# Altium PCB Havashenasi.PcbDoc
Units mm, origin at the board's own origin, x right, y up, seen from the top; angles counter-clockwise.
Board outline 100 x 65 mm, 2 copper layers (Top Layer, Bottom Layer); 76 components, 67 nets, 338 pads, 82 vias.
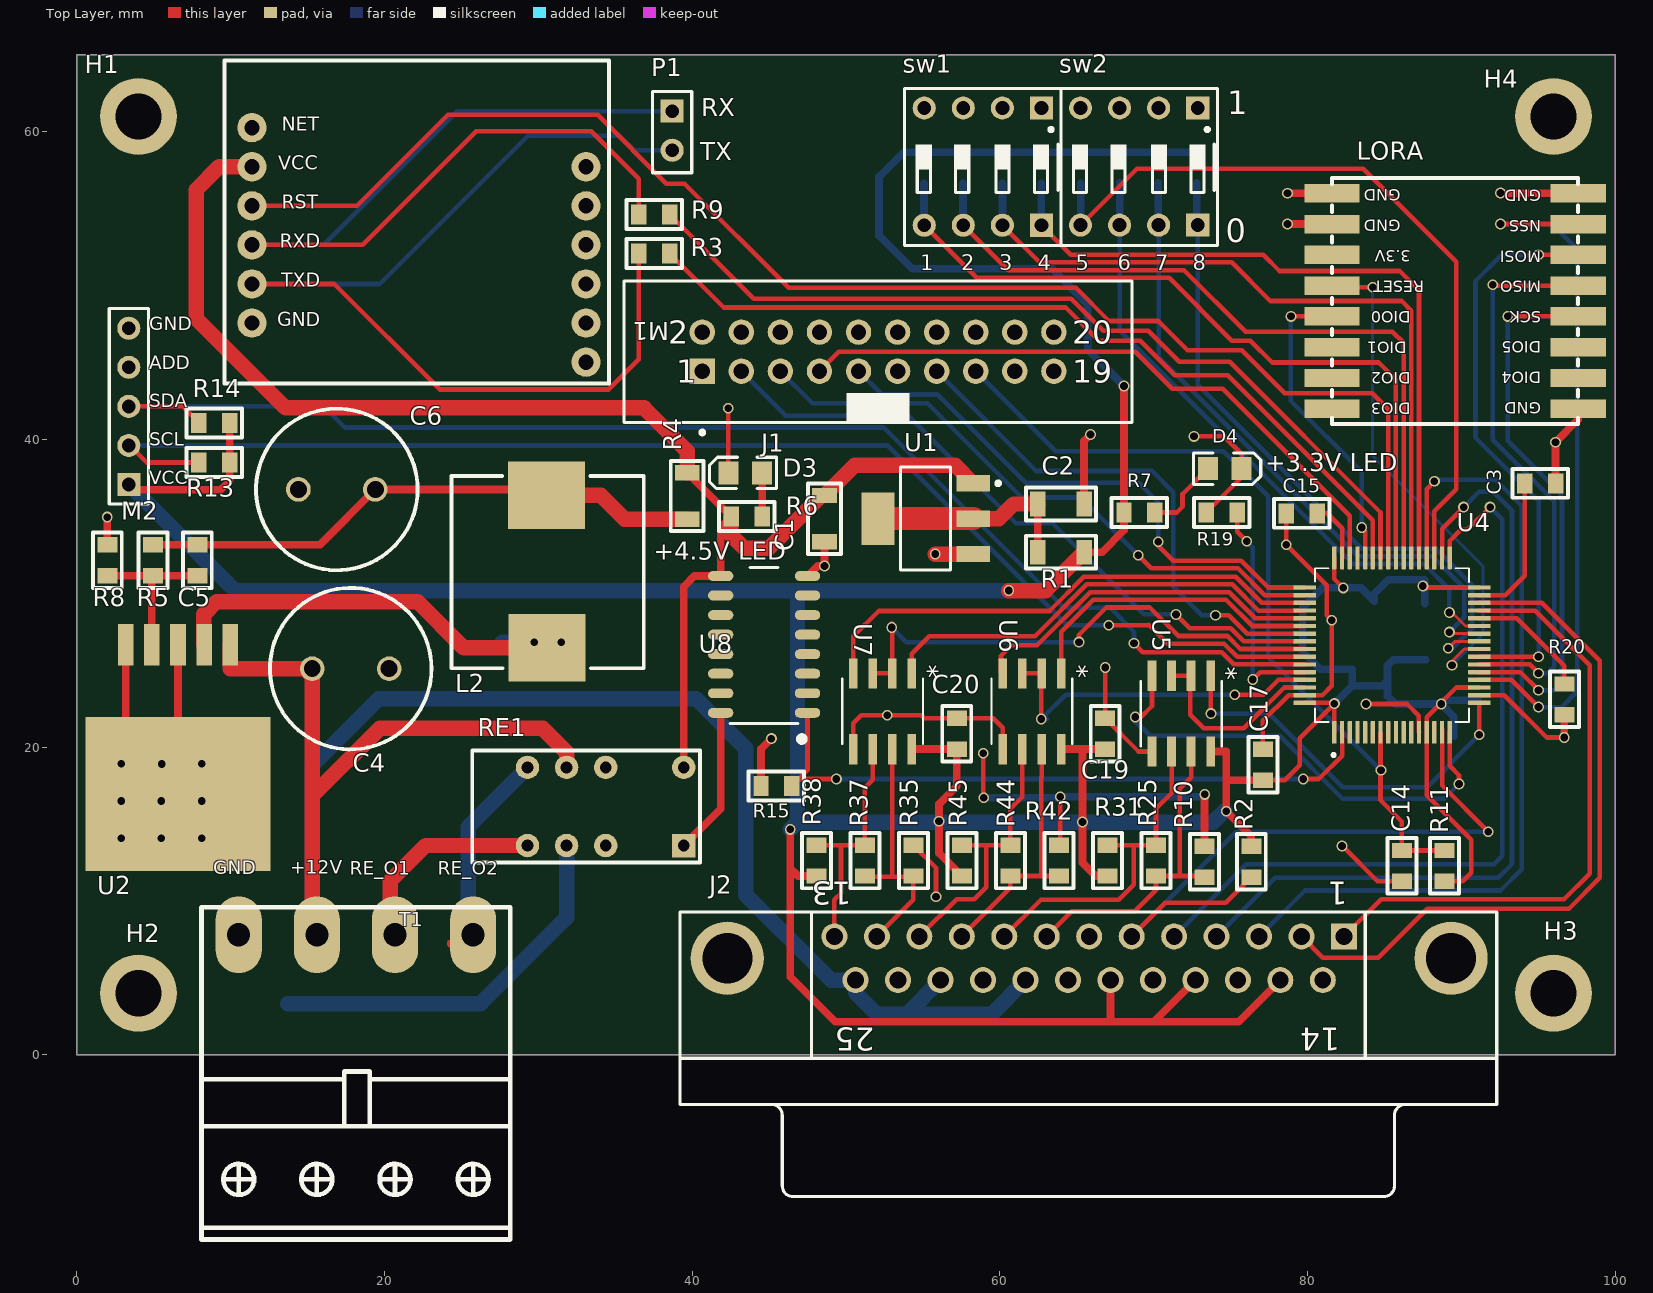
[diagram p0: Top Layer view]
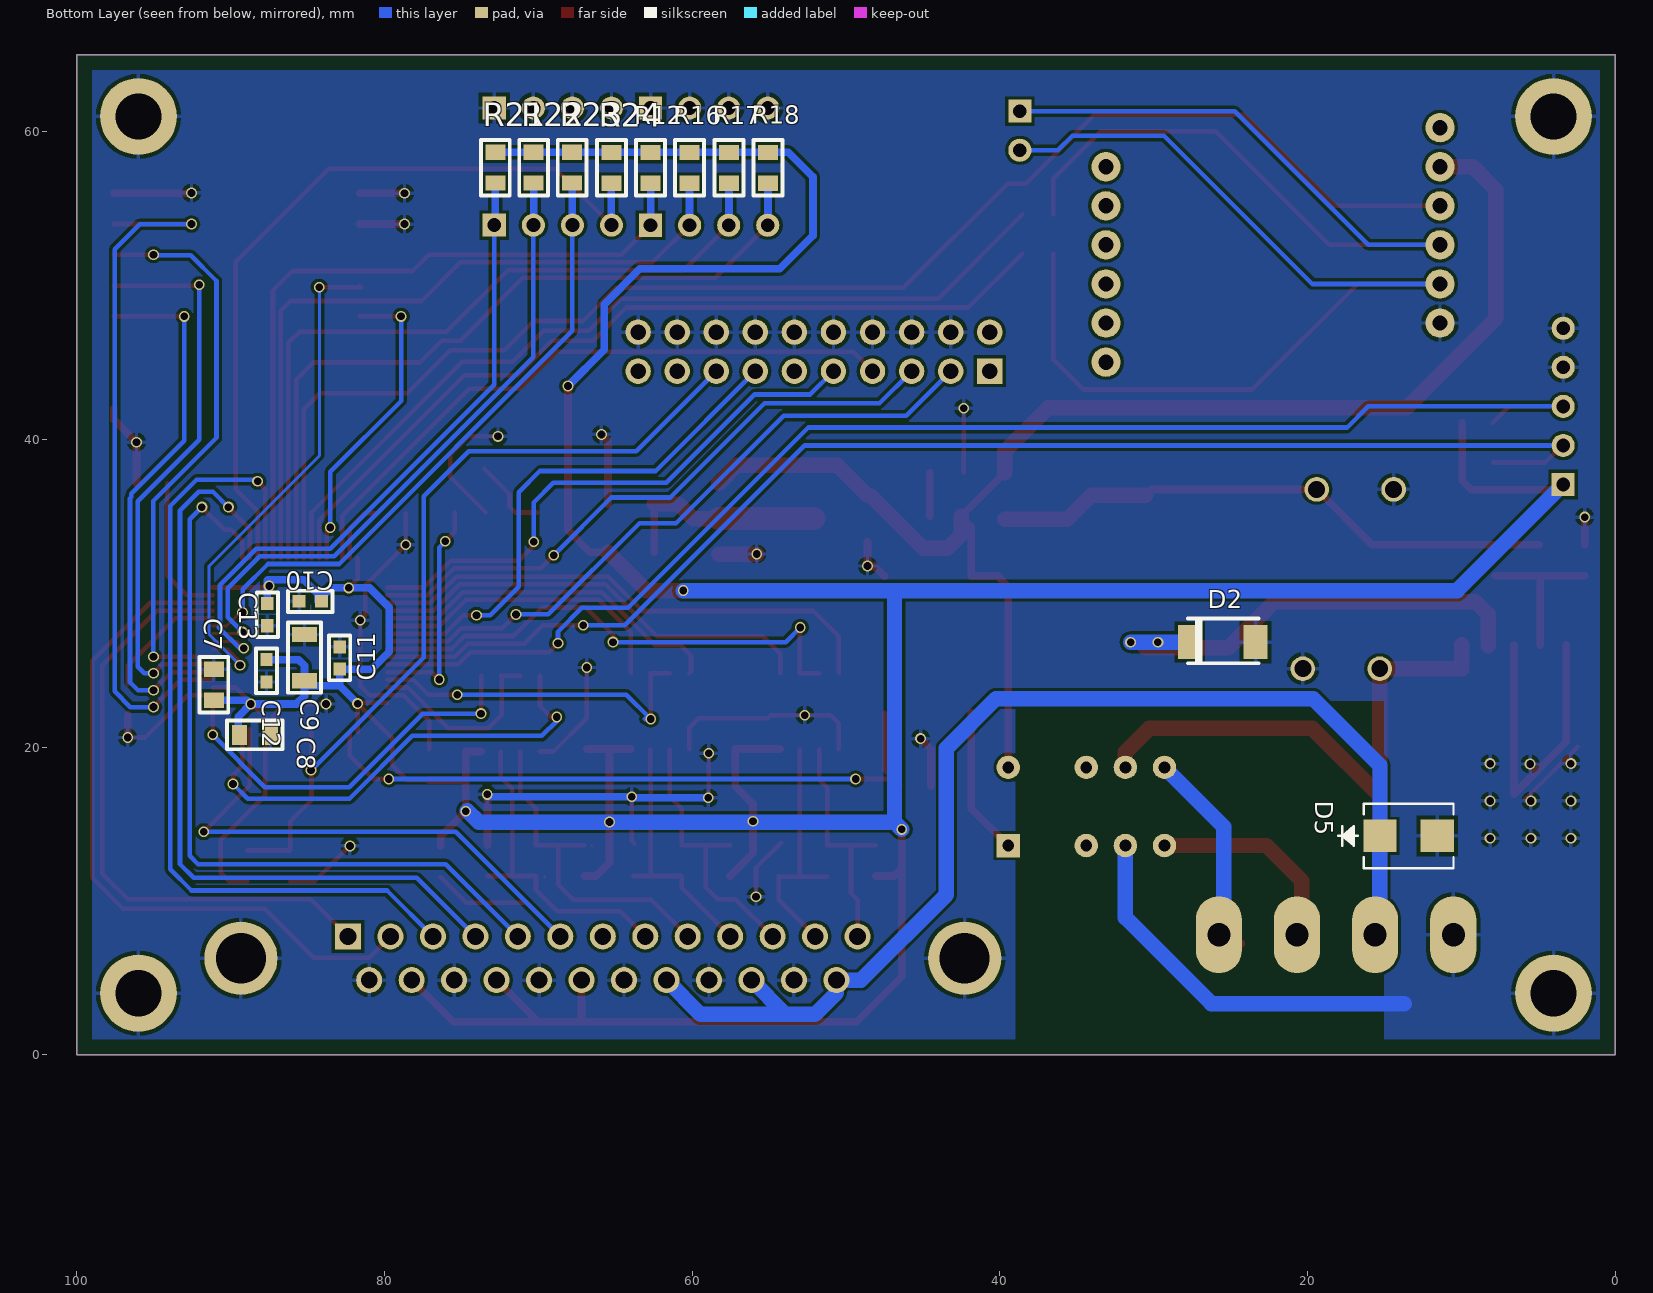
[diagram p1: Bottom Layer view, seen from below]

## Layer stack, top to bottom
Top Solder: solder mask 0.0102, Solder Resist, Dk 3.5
Top Layer: signal copper 0.0356
Dielectric 1: dielectric 0.32, FR-4, Dk 4.8
Bottom Layer: signal copper 0.0356
Bottom Solder: solder mask 0.0102, Solder Resist, Dk 3.5

## Board outline
0,0 0,65 100,65 100,0

## Design rules (kind name [scope] priority, off if disabled: settings)
Clearance [All] p1: gap=0.2 ignorepadtopadclearanceinfootprint=FALSE except(0: Arc-Hole Track-Hole SMDPad-Hole THPad-Hole Via-Hole Fill-Hole Poly-Hole Region-Hole Text-Hole)
Height [All] p1: minheight=0 maxheight=50.4 prefheight=12.7
HoleSize [All] p1: absolutevalues=TRUE maxlimit=4 minlimit=0.025 maxpercent=80.000 minpercent=20.000
MinimumSolderMaskSliver [All] p1: minsoldermaskwidth=0.1
PolygonConnect [All] p1: connectstyle=Relief reliefconductorwidth=0.254 reliefentries=4 polygonreliefangle="90 Angle" airgapwidth=0.254
RoutingVias [All] p1: holewidth=0.7 width=1 viastyle="Through Hole" minholewidth=0.7 minwidth=0.8 maxholewidth=4 maxwidth=6
SolderMaskExpansion [All] p1: expansion=0.102
Width [All] p1: maxlimit=2 minlimit=0.2 preferedwidth=0.3
27 further rules are at their usual default settings.

## Classes and differential pairs
component class Alarm: R15 RE1 U8
component class RS485: C17 C19 C20 R10 R25 R31 R35 R37 R38 R42 R44 R45 U5 U6 U7
component class STM32F405RGT6: C3 C7 C8 C9 C10 C11 C12 C13 C14 C15 J1 R2 R11 R12 R13 R14 R16 R17 R18 R19 R20 R21 R22 R23 R24 sw1 sw2 U4
component class Power: C1 C2 C4 C5 C6 D2 D3 D4 D5 L2 R1 R4 R5 R6 R7 R8 U1 U2
component class SIM800_Module: M1 P1 R3 R9
component class Connector: J2 M2 T1
component class Havashenasi: H1 H2 H3 H4
component class Lora: LORA

## Components (designator, comment, footprint, x,y, rotation, side; value= is the part's Value field where it differs from the comment)
C1 "C-1206" C-1206 48.6,34.825 r90 top value=10uF
C2 "C-1206" C-1206 64,35.8 r180 top value=22uF
C3 "C-805" C-805 95.151,37.15 r180 top value=2.2uF
C4 "Cap Pol1" RB5-10.5 17.8,25.1 r0 top value=220uF
C5 "C-805" C-805 7.825,32.125 r90 top value=2.2nF
C6 "Cap Pol1" RB5-10.5 16.9,36.75 r180 top value=1000uF
C7 "C-805" C-805 91.1,24.025 r90 bottom value=100nF
C8 "C-805" C-805 88.4,20.8 r0 bottom value=1uF
C9 "C-1206" C-1206 85.2,25.845 r270 bottom value=4.7uF
C10 "C-603" C-603 84.823,29.477 r0 bottom value=100nF
C11 "C-603" C-603 82.914,25.794 r90 bottom value=100nF
C12 "C-603" C-603 87.671,24.959 r270 bottom value=100nF
C13 "C-603" C-603 87.621,28.615 r270 bottom value=100nF
C14 "C-805" C-805 86.139,12.301 r270 top value=100nF
C15 "C-805" C-805 79.6,35.2 r0 top value=2.2uF
C17 "C-805" C-805 77.1,18.875 r270 top value=100nF
C19 "C-805" C-805 66.85,20.9 r270 top value=100nF
C20 "C-805" C-805 57.2,20.9 r270 top value=100nF
D2 "1N5822" 1N5822 27.65,26.825 r180 bottom
D3 "LED-805" LED-805 43.45,37.825 r180 top
D4 "LED-805" LED-805 74.625,38.1 r0 top
D5 "SMBJ12A" SMB 13.425,14.225 r180 bottom value=Value
H1 "HOLE_3mm" Hole_3mm#1 -11.2,61.125 r0 top
H2 "HOLE_3mm" Hole_3mm#2 -9.777,4.683 r0 top
H3 "HOLE_3mm" Hole_3mm#3 79.15,3.75 r0 top
H4 "HOLE_3mm" Hole_3mm#4 79.05,61 r0 top
J1 "IDC_2x10" IDC2.54-V20D 52.085,45.705 r0 top
J2 "D Connector 25" DSUB1.385-2H25A 65.812,-3.23 r180 top
L2 "68 uH" Inductor 30.55,26.45 r90 top
LORA "LORA" LORA-RA2-SMD 89.6,49 r180 top
M1 "SIM800_Module_Top" SIM800_Module_Top 22.55,52.625 r0 top
M2 "GY-30_Straight" GY-30_Straight 3.375,37.07 r90 top
P1 "Header 2" HDR1X2 38.7,61.34 r270 top
R1 "R-1206" R-1206 63.95,32.675 r0 top value=0
R2 "R-805" R-805 76.35,12.525 r90 top value=4.7K
R3 "R-805" R-805 37.505,52.083 r0 top value=1k
R4 "R-1206" R-1206 39.675,36.3 r90 top value=0
R5 "R-805" R-805 4.95,32.176 r270 top value=5.1k
R6 "R-805" R-805 43.575,35 r180 top value=1k
R7 "R-805" R-805 69.1,35.25 r180 top value=1k
R8 "R-805" R-805 1.975,32.125 r90 top value=1.96k
R9 "R-805" R-805 37.505,54.623 r0 top value=1k
R10 "R-805" R-805 73.304,12.525 r90 top value=750
R11 "R-805" R-805 88.918,12.3 r270 top value=1k
R12 "R-805" R-805 62.7,57.625 r90 bottom value=10k
R13 "R-805" R-805 8.904,38.5 r0 top value=10k
R14 "R-805" R-805 8.904,41.075 r0 top value=10k
R15 "R-805" R-805 45.45,17.475 r0 top value=10k
R16 "R-805" R-805 60.175,57.625 r90 bottom value=10k
R17 "R-805" R-805 57.6,57.625 r90 bottom value=10k
R18 "R-805" R-805 55.075,57.625 r90 bottom value=10k
R19 "R-805" R-805 74.398,35.25 r0 top value=10k
R20 "R-805" R-805 96.7,23.125 r270 top value=10k
R21 "R-805" R-805 72.8,57.65 r90 bottom value=10k
R22 "R-805" R-805 70.3,57.65 r90 bottom value=10k
R23 "R-805" R-805 67.8,57.65 r90 bottom value=10k
R24 "R-805" R-805 65.251,57.626 r90 bottom value=10k
R25 "R-805" R-805 70.15,12.65 r270 top value=150
R31 "R-805" R-805 66.996,12.599 r90 top value=750
R35 "R-805" R-805 54.382,12.599 r90 top value=750
R37 "R-805" R-805 51.229,12.65 r270 top value=150
R38 "R-805" R-805 48.075,12.599 r90 top value=750
R42 "R-805" R-805 63.843,12.599 r90 top value=750
R44 "R-805" R-805 60.689,12.65 r270 top value=150
R45 "R-805" R-805 57.536,12.599 r90 top value=750
RE1 "EC2-5NU" EC2-5NU 39.455,18.68 r270 top
sw1 "dip_sw4" dipSW_4 62.705,61.545 r180 top
sw2 "dip_sw4" dipSW_4 72.865,61.55 r180 top
T1 "PHONIX4" PHONIX4 25.76,7.8 r180 top
U1 "AMS1117" AMS1117 55.425,34.925 r90 top
U2 "LM2596-ADJ" LM2596SX 6.575,17.6 r180 top
U4 "STM32F405RGT6" stm32f405rgt6 85.5,26.625 r90 top
U5 "ADM3485ARZ" R_8 71.8,22.175 r270 top value=Value
U6 "ADM3485ARZ" R_8 62.087,22.325 r270 top value=Value
U7 "ADM3485ARZ" R_8 52.375,22.325 r270 top value=Value
U8 "ULN2003" ULN20003 44.675,26.675 r180 top value=Value

## Footprints (in the part's own frame and the unit in brackets; to place one, negate y for a bottom-side part, rotate by r counter-clockwise, add the part's x,y. Pads: shape width x height; smd on the part's side, far side on the other; paste and mask are expansions set on the pad)
1N5822 [mm] "Shotky"
  rect 1.56x2.22 smd: 1(0,0) 2(4.275,0)
  silkscreen extent -0.13,-1.38 4.47,1.53
AMS1117 [mm]
  rect 1.05x2.15 smd: 1(2.224,-2.846) 2(-2.376,-2.846) 3(-0.076,-2.846)
  rect 3.4x2.15 smd: 3(-0.076,3.354)
  silkscreen extent -3.43,-4.6 3.27,1.88, body extent -3.4,-3.74 3.3,3.55, height 1.81
C-603 [mm] "Chip Capacitor, Body 1.6x0.8mm, IPC High Density"
  rect 0.85x0.8 smd: 1(-0.725,0) 2(0.725,0)
  silkscreen extent -1.45,-0.69 1.45,0.69
C-805 [mm] "Chip Capacitor, Body 1.6x0.8mm, IPC High Density"
  rect 1x1.3 smd: 1(-0.979,0) 2(1.03,0)
  silkscreen extent -1.78,-0.94 1.83,0.94, body extent -1.05,-0.65 0.95,0.66, height 0.73
C-1206 [mm] "Chip Capacitor, Body 3.2x1.6mm, IPC High Density"
  rect 1x1.6 smd: 1(-1.477,0) 2(1.528,0)
  silkscreen extent -2.26,-1.07 2.31,1.07, body extent -1.5,-0.86 1.7,0.8, height 1.53
dipSW_4 [mm] "Connector; Header; 4 Position"
  rect 1.5x1.5 hole 0.9: 1(0,0) 8(0,7.62)
  round 1.5 hole 0.9: 2(2.54,0) 3(5.08,0) 4(7.62,0) 5(7.62,7.62) 6(5.08,7.62) 7(2.54,7.62)
  silkscreen extent -1.28,-1.27 8.9,8.93
DSUB1.385-2H25A [mm] "Connector; D Subminiature; 25 Position; Right Angle; Pitch 1.385 mm"
  rect 1.69x1.69 hole 1.09: 1(-16.566,-10.92)
  round 1.69 hole 1.09: 2(-13.805,-10.92) 3(-11.044,-10.92) 4(-8.283,-10.92) 5(-5.522,-10.92) 6(-2.761,-10.92) 7(0,-10.92) 8(2.761,-10.92) 9(5.522,-10.92) 10(8.283,-10.92) 11(11.044,-10.92) 12(13.805,-10.92) 13(16.566,-10.92) 14(-15.185,-8.08) 15(-12.424,-8.08) 16(-9.663,-8.08) 17(-6.902,-8.08) 18(-4.141,-8.08) 19(-1.38,-8.08) 20(1.381,-8.08) 21(4.142,-8.08) 22(6.903,-8.08) 23(9.664,-8.08) 24(12.425,-8.08) 25(15.186,-8.08)
  round 4.76 hole 3.26: 26(-23.526,-9.5) 27(23.526,-9.5)
  silkscreen extent -26.5,-12.5 26.6,6, body extent -26.52,-12.64 26.52,6.15, height 12.55
EC2-5NU [mil] "relay"
  round 60 hole 30: 1(0,0) 2(0,-200) 3(0,-300) 4(0,-400) 6(200,-200) 7(200,-300) 8(200,-400)
  rect 60x60 hole 30: 5(200,0)
  silkscreen extent -43,-541 243,41, body extent -47,-545 248,45, height 354
GY-30_Straight [mm]
  rect 1.5x1.5 hole 0.9: 1(0,0)
  round 1.5 hole 0.9: 2(2.54,0) 3(5.08,0) 4(7.62,0) 5(10.16,0)
  silkscreen extent -1.27,-1.27 11.43,1.27, body extent -2.5,-1.3 12.6,4.99, height 33.6
HDR1X2 [mm] "Connector; Header; 3 Position"
  rect 1.5x1.5 hole 0.9: 1(0,0)
  round 1.5 hole 0.9: 2(2.54,0)
  silkscreen extent -1.27,-1.27 4,1.27
Hole_3mm#1 [mm]
  round 5 hole 3: 1(15.2,-0.125)
Hole_3mm#2 [mm]
  round 5 hole 3: 1(13.777,-0.683)
Hole_3mm#3 [mm]
  round 5 hole 3: 1(16.85,0.25)
Hole_3mm#4 [mm]
  round 5 hole 3: 1(16.95,0)
IDC2.54-V20D [mm] "Connector; IDC, Low Profile Male Header, Thru-Hole; 20 Position; Vertical; Pitch 2.54 mm; Body 33.02 x 9.2 x 9.45 mm (LxWxH)"
  rect 1.65x1.65 hole 1: 1(-11.43,-1.27)
  round 1.65 hole 1: 2(-11.43,1.27) 3(-8.89,-1.27) 4(-8.89,1.27) 5(-6.35,-1.27) 6(-6.35,1.27) 7(-3.81,-1.27) 8(-3.81,1.27) 9(-1.27,-1.27) 10(-1.27,1.27) 11(1.27,-1.27) 12(1.27,1.27) 13(3.81,-1.27) 14(3.81,1.27) 15(6.35,-1.27) 16(6.35,1.27) 17(8.89,-1.27) 18(8.89,1.27) 19(11.43,-1.27) 20(11.43,1.27)
  silkscreen extent -16.51,-5.37 16.51,4.6, body extent -16.51,-4.32 16.51,4.48, height 9.1
Inductor [mm]
  rect 4.4x5 smd: 1(0,0) 2(9.925,0.025)
  silkscreen extent -1.32,-6.3 11.18,6.2
LED-805 [mm] "Chip Resistor; Body 2.0 x 1.3 mm (LxW typ)"
  rect 1.3x1.5 smd: 1(-1.1,0) 2(1.1,0)
  silkscreen extent -2.03,-1.02 2.34,1.02, body extent -1.2,-0.67 0.9,0.68, height 1.1
LM2596SX [mil]
  rect 40x106 smd: 1(-134,-356) 2(-67,-356) 3(0,-356) 4(67,-356) 5(134,-356)
  rect 472.44x393.7 smd: 6(0,25.68)
  body extent -207,-346 203,131, height 189
LORA-RA2-SMD [mil]
  rect 141.7x47.2 smd: 1(-315,276) 2(-315,197) 3(-315,118) 4(-315,39) 5(-315,-39) 6(-315,-118) 7(-315,-197) 8(-315,-276) 9(315,-276) 10(315,-197) 11(315,-118) 12(315,-39) 13(315,39) 14(315,118) 15(315,197) 16(315,276)
  silkscreen extent -315,-315 315,315
PHONIX4 [mm]
  oval 3x5 hole 1.5: 1(0,0) 2(5.08,0) 3(10.16,0) 4(15.24,0)
  silkscreen extent -2.41,-1.78 17.65,19.81
R-805 [mm] "Chip Capacitor, Body 1.6x0.8mm, IPC High Density"
  rect 1x1.3 smd: 1(-0.979,0) 2(1.03,0)
  silkscreen extent -1.78,-0.94 1.83,0.94, body extent -1.05,-0.63 0.95,0.63, height 0.5
R-1206 [mm] "Chip Capacitor, Body 3.2x1.6mm, IPC High Density"
  rect 1x1.6 smd: 1(-1.477,0) 2(1.528,0)
  silkscreen extent -2.26,-1.07 2.31,1.07, body extent -1.87,-0.8 1.87,0.8, height 0.7
R_8 [mm]
  rect 1.97x0.568 smd paste+0 mask+0: 1(-2.464,1.905) 2(-2.464,0.635) 3(-2.464,-0.635) 4(-2.464,-1.905) 5(2.464,-1.905) 6(2.464,-0.635) 7(2.464,0.635) 8(2.464,1.905)
  silkscreen extent -2.12,-2.63 2.12,2.63, body extent -3.1,-2.5 3.1,2.5, height 1.76
RB5-10.5 [mm] "Capacitor (Radial); 2 Leads"
  round 1.6 hole 1.1: 1(-2.5,0) 2(2.5,0)
  silkscreen extent -5.25,-5.25 5.25,5.25, body extent -4.9,-4.85 5.11,5.15, height 16.01
SIM800_Module_Top [mm]
  round 1.905 hole 1: 1(-11.168,-5.057) 2(-11.168,-2.517) 3(-11.168,0.023) 4(-11.168,2.563) 5(-11.168,5.103) 6(-11.168,7.643) 7(10.549,5.103) 8(10.549,2.563) 9(10.549,0.023) 10(10.549,-2.517) 11(10.549,-5.057) 12(10.549,-7.597)
  silkscreen extent -12.95,-9 12.05,12, body extent -12.91,-10.6 11.91,12.7, height 5.33
SMB [mm]
  rect 2.17x2.11 smd paste+0 mask+0: 1(-1.86,0) 2(1.86,0)
  silkscreen extent -4.57,-2.1 2.92,2.1, body extent -2.79,-1.97 2.8,1.97, height 2.45
stm32f405rgt6 [mm]
  rrect25% 1.47x0.28 smd: 1(-5.67,3.75) 2(-5.67,3.25) 3(-5.67,2.75) 4(-5.67,2.25) 5(-5.67,1.75) 6(-5.67,1.25) 7(-5.67,0.75) 8(-5.67,0.25) 9(-5.67,-0.25) 10(-5.67,-0.75) 11(-5.67,-1.25) 12(-5.67,-1.75) 13(-5.67,-2.25) 14(-5.67,-2.75) 15(-5.67,-3.25) 16(-5.67,-3.75) 33(5.67,-3.75) 34(5.67,-3.25) 35(5.67,-2.75) 36(5.67,-2.25) 37(5.67,-1.75) 38(5.67,-1.25) 39(5.67,-0.75) 40(5.67,-0.25) 41(5.67,0.25) 42(5.67,0.75) 43(5.67,1.25) 44(5.67,1.75) 45(5.67,2.25) 46(5.67,2.75) 47(5.67,3.25) 48(5.67,3.75)
  rrect25% 0.28x1.47 smd: 17(-3.75,-5.67) 18(-3.25,-5.67) 19(-2.75,-5.67) 20(-2.25,-5.67) 21(-1.75,-5.67) 22(-1.25,-5.67) 23(-0.75,-5.67) 24(-0.25,-5.67) 25(0.25,-5.67) 26(0.75,-5.67) 27(1.25,-5.67) 28(1.75,-5.67) 29(2.25,-5.67) 30(2.75,-5.67) 31(3.25,-5.67) 32(3.75,-5.67) 49(3.75,5.67) 50(3.25,5.67) 51(2.75,5.67) 52(2.25,5.67) 53(1.75,5.67) 54(1.25,5.67) 55(0.75,5.67) 56(0.25,5.67) 57(-0.25,5.67) 58(-0.75,5.67) 59(-1.25,5.67) 60(-1.75,5.67) 61(-2.25,5.67) 62(-2.75,5.67) 63(-3.25,5.67) 64(-3.75,5.67)
  silkscreen extent -7.24,-5 5,5, body extent -5.96,-6.01 6.06,6.01, height 1.6
ULN20003 [mm]
  oval 1.65x0.65 smd paste+0 mask+0.051: 1(-2.825,4.445) 2(-2.825,3.175) 3(-2.825,1.905) 4(-2.825,0.635) 5(-2.825,-0.635) 6(-2.825,-1.905) 7(-2.825,-3.175) 8(-2.825,-4.445) 9(2.825,-4.445) 10(2.825,-3.175) 11(2.825,-1.905) 12(2.825,-0.635) 13(2.825,0.635) 14(2.825,1.905) 15(2.825,3.175) 16(2.825,4.445)
  silkscreen extent -2.58,-5 2.2,6.27

## Part data
C1 C2 C3 C5 C7 C8 C9 C10 C11 C12 C13 C14 C15 C17 C19 C20: "Capacitor", LatestRevisionDate=29-May-2009, LatestRevisionNote="IPC-7351 Footprint Added.", PackageDescription="Chip Capacitor", PackageReference=C1206, Published=8-Jun-2000, Publisher="Altium Limited"
C4 C6: "Polarized Capacitor (Radial)", LatestRevisionDate=17-Jul-2002, LatestRevisionNote="Re-released for DXP Platform.", PackageDescription="Polarized Capacitor (Radial); 2 Leads", PackageReference=RB7.6-15, Published=8-Jun-2000, Publisher="Altium Limited"
D3 D4: "LED Size 805", LatestRevisionDate=17-Jul-2002, LatestRevisionNote="Re-released for DXP Platform.", PackageDescription="SM LED; 2 Flat Leads", PackageReference=3.2X1.6X1.1, PackageVersion=Feb-2002, Published=8-Jun-2000, Publisher="Altium Limited"
D5: "No Description Available", Manufacturer_Part_Number=SMBJ12A-13-F, Built_By=EMA_UL_Team, Copyright="Copyright (C) 2018 Accelerated Designs. All rights reserved", RefDes=RefDes, Type=DEV, Vendor="Diodes Inc"
J1: library part JTAG_JLINK, "20 Pin Standard JTAG Header For ARM JLINK", Max Current=mA, Category=Headers, Company="SJ Libraries", ComponentLink1Description=Datasheet, ComponentLink2Description=Reference, Connector type=IDC2.54-20, designer="Eng. Saeid Jorablo", HelpURL=http://s3.picofile.com/file/7443264187/Coming_Soon_logo.gif, Mounting Technology=Through-Hole, Orientation=Vertical, Pin Count=20, Positions=20, Publisher="SJ UnLimited", Revision 1="7/8/2012: Create Model", Status=Unreleased, Update=7/8/2012
J2: "Receptacle Assembly, 25 Position, Right Angle", PackageDocument=U, DatasheetDocument=19-Mar-1999, Gender=Receptacle, LatestRevisionDate=17-Jul-2002, LatestRevisionNote="Re-released for DXP Platform.", Orientation="Right Angle", PackageReference=787202, Positions=25, Published=15-Jun-2001, Publisher="Altium Limited"
L2: library part Inductor, "Power inductor"
P1: "Header, 3-Pin", LatestRevisionDate=17-Jul-2002, LatestRevisionNote="Re-released for DXP Platform.", Publisher="Altium Limited"
R1 R2 R3 R4 R5 R6 R7 R8 R9 R10 R11 R12 R13 R14 R15 R16 R17 R18 R19 R20 R21 R22 R23 R24 R25 R31 R35 R37 R38 R42 R44 R45: "Resistor"
RE1: library part EC2_5NU
sw1 sw2: "dip switch, 4-Pin", LatestRevisionDate=17-Jul-2002, LatestRevisionNote="Re-released for DXP Platform.", Publisher="Altium Limited"
U1: "3.3v regulator"
U2: "SIMPLE SWITCHER Power Converter 150 KHz 3A Step-Down Voltage Regulator 5-DDPAK/TO-263", Package="TO-263-6 Texas Instruments", Availability=Unavailable, MF="Texas Instruments", MP=LM2596-ADJ, Price="1.83 USD", SnapEDA_Link=https://www.snapeda.com/parts/LM2596SX-12/Texas%20Instruments/view-part/?ref=snap
U4: "ARMÂ® CortexÂ®-M4 STM32F4 Microcontroller IC 32-Bit 168MHz 1MB _1M x 8_ FLASH 64-LQFP _10x10_", Package="LQFP-64 STMicroelectronics", Digi-Key_Part_Number=497-11767-ND, Digi-Key_Purchase_URL=https://www.digikey.com/product-detail/en/stmicroelectronics/STM32F405RGT6/497-11767-ND/2754208?utm_source=snapeda&utm_medium=aggregator&utm_campaign=symbol, MF=STMicroelectronics, MP=STM32F405RGT6, SnapEDA_Link=https://www.snapeda.com/parts/STM32F405RGT6/STMicroelectronics/view-part/105502/?ref=snap
U5 U6 U7: "No Description Available", Built_By=EMA_UL_Team, Copyright="Copyright (C) 2018 Accelerated Designs. All rights reserved", Manufacturer_Part_Number=ADM3485ARZ, RefDes=RefDes, Type=DEV, Vendor="Analog Devices Inc"
U8: "No Description Available", Manufacturer="Texas Instruments", PartNumber=ULN2003ADR, Copyright="Copyright (C) 2018 Accelerated Designs. All rights reserved", RefDes=RefDes, Type=DEV
M2: LatestRevisionDate=17-Jul-2002, LatestRevisionNote="Re-released for DXP Platform.", Publisher="Altium Limited"

## Via types
v1: diameter 0.7, hole 0.5, Top Layer to Bottom Layer, 82 vias

## Nets (pads, with @x,y where several pads share a name; then routed paths per layer and width w, separated by ;. In a path a pad name is that pad's centre, name@x,y a point inside that pad or via, vN(x,y) a via of type N, cw(c..) or ccw(c..) an arc to the next point about the centre after c; other vN are vias at no path point)
+3.3V: C7.1 C8.2 C9.2 C10.1 C11.1 C12.1 C13.1 C17.2 C19.2 C20.2 J2.15 J2.17 J2.19 M2.1 R1.2 R2.2 R7.2 R11.2 R12.2 R13.2 R14.2 R16.2 R17.2 R18.2 R21.2 R22.2 R23.2 R24.2 R31.1 R38.1 R45.1 U4.1 U4.13 U4.19 U4.32 U4.48 U4.64 U5.8 U6.8 U7.8 | length 338.1
  Top Layer w0.3: 74.725,19.705 74.75,19.73 ; C17.2 78.52,17.845 79.5,18.825 79.5,20.575 v1(81.75,22.825) ; U4.64 81.7,22.875 v1(81.75,22.825) ; U4.1 v1(81.75,22.825) ; U4.48 81.75,30.925 v1(82.325,30.35) ; v1(87.504,30.476) 87.606,30.375 U4.32 ; R11.2 90.095,11.27 90.65,11.825 90.65,13.975 87.75,16.875 U4.13 87.75,21.95 89.675,23.875 U4.19
  Top Layer w0.5: M2.1@3.125,37.07 M2.1 3.72,36.725 9.35,36.725 9.934,37.309 R13.2 R14.2 ; v1(46.375,14.65) 46.375,12.125 ; R38.1 46.88,11.62 46.375,12.125 ; U7.8 54.289,19.87 C20.2 57.2,17.45 56.05,16.3 v1(56.05,15.175) 56.05,13.106 R45.1 ; U6.8 64.001,19.87 65.3,19.87 ; R1.2 66.65,32.675 68.07,34.095 R7.2 v1@68.07,43.48 ; C19.2 65.3,19.87 ; R31.1 66.23,11.62 65.375,12.475 v1(65.375,15.125) 65.375,19.795 65.3,19.87 ; J2.19 67.192,2.158 67.2,2.15 ; J2.17 70.014,2.15 ; U5.8@73.711,19.705 U5.8 74.719,19.711 74.725,19.705 74.725,17.875 ; R2.2 76.35,14.2 v1(74.725,15.825) 74.725,17.875 ; C17.2 74.755,17.845 74.725,17.875 ; J2.15 75.536,2.15 70.014,2.15 ; 46.375,12.125 46.375,5.075 49.3,2.15 67.2,2.15 ; 67.2,2.15 70.014,2.15
  Top Layer w1: v1(60.575,30.175) 60.578,30.172 62.975,30.172 R1.2
  Bottom Layer w0.5: v1(68.075,43.475) 65.725,45.825 65.725,48.775 63.4,51.1 54.3,51.1 52.15,53.25 52.15,57.075 53.755,58.68 60.175,58.68 R21.2 ; v1(81.75,22.825) 82.914,23.989 ; C10.1@84.348,29.477 C10.1@84.348,29.481 ; C13.1 87.621,30.854 87.6,30.875 85.25,30.875 84.348,29.973 C10.1@84.348,29.481 ; C12.1 85.591,25.684 85.2,25.294 C9.2 ; C8.2@89.52,20.725 89.52,21.98 v1(88.7,22.8) ; C7.1 88.946,23.046 v1(88.7,22.8) ; 82.914,23.989 C11.1 80.831,25.069 79.7,26.2 79.7,29.075 80.975,30.35 v1(82.325,30.35) 83.479,30.35 C10.1@84.348,29.481 ; 82.914,23.989 84.872,23.989 C9.2 ; C9.2 85.2,23.325 85.725,22.8 v1(88.7,22.8)
  Bottom Layer w1: M2.1 10.27,30.175 46.85,30.175 ; v1(46.375,14.65) 46.85,15.125 v1(65.375,15.125) 73.875,15.125 v1@74.625,15.875 ; 46.85,15.325 46.85,30.175 ; v1(60.575,30.175) 46.85,30.175
+3.3V_LORA: LORA.11
+4.5V: C1.2 M1.5 R4.2 R6.2 RE1.1 U1.1 U8.9 | length 92.1
  Top Layer w0.5: RE1.1 39.455,30.43 40.145,31.12 U8.9 41.85,34.305 R6.2@42.503,34.958 ; R4.2 R6.2@42.503,35
  Top Layer w1: M1.5 9.253,57.728 7.75,56.225 7.75,47.875 13.575,42.05 36.875,42.05 39.675,39.25 R4.2 ; R6.2@42.503,35 42.503,34.958 42.503,33.822 43.4,32.925 44.975,32.925 48.403,36.353 C1.2 50.572,38.325 57.095,38.325 U1.1
+12V: C4.1 D5.1 J2.21 J2.23 J2.25 RE1.3 T1.3 U2.1 | length 120.8
  Top Layer w1: U2.1 9.979,25.1 14.8,25.1 15.29,24.61 15.29,16.825 ; T1.3@15.29,8.25 15.29,16.825 ; RE1.3 31.835,19.665 30.275,21.225 19.69,21.225 15.29,16.825
  Bottom Layer w1: T1.3@15.29,8.25 15.29,14.22 D5.1 15.285,18.81 19.625,23.15 40.25,23.15 43.475,19.925 43.475,10.4 49.025,4.85 J2.25 50.626,4.024 52.025,2.625 53.923,2.625 ; J2.23 53.923,2.625 ; J2.21 59.445,2.625 53.923,2.625
addr0: R18.1 sw1.5 U4.40 | length 49.1
  Top Layer w0.3: sw1.5 58.51,50.5 71.01,50.5 75.085,46.425 76.275,46.425 77.7,45 84.625,45 85.75,43.875 U4.40
  Bottom Layer w0.5: R18.1 55.075,53.935 sw1.5
addr1: R17.1 sw1.6 U4.39 | length 48.5
  Top Layer w0.3: sw1.6 60.55,51 71.975,51 75.975,47 85.525,47 86.25,46.275 U4.39
  Bottom Layer w0.5: R17.1 57.6,53.95 sw1.6
addr2: R16.1 sw1.7 U4.38 | length 47.7
  Top Layer w0.3: sw1.7 62.582,51.508 75.082,51.508 77.59,49 86.125,49 86.75,48.375 U4.38
  Bottom Layer w0.5: sw1.7 60.175,53.935 R16.1
addr3: R12.1 sw1.8 U4.37 | length 46.4
  Top Layer w0.3: sw1.8 64.622,52.008 77.122,52.008 78.18,50.95 86,50.95 87.25,49.7 U4.37
  Bottom Layer w0.5: R12.1 62.7,53.93 sw1.8
addr4: R24.1 sw2.5 U4.35 | length 51
  Top Layer w0.3: sw2.5 68.915,57.6 83.625,57.6 89.675,51.55 89.675,36.75 88.25,35.325 U4.35
  Bottom Layer w0.5: sw2.5 65.251,53.936 R24.1
addr5: R23.1 sw2.6 U4.27 | length 41.8
  Top Layer w0.2: v1(89.225,28.75) 89.4,28.75 90.275,27.875 U4.27
  Bottom Layer w0.3: sw2.6 67.785,47.065 82.95,31.9 87.575,31.9 89.225,30.25 v1(89.225,28.75)
  Bottom Layer w0.5: sw2.6 67.8,53.945 R23.1
addr6: R22.1 sw2.7 U4.26 | length 42.7
  Top Layer w0.2: v1(89.225,27.475) 89.325,27.375 U4.26
  Bottom Layer w0.3: sw2.7 70.325,45.35 83.275,32.4 88.125,32.4 90.2,30.325 90.2,28.45 v1(89.225,27.475)
  Bottom Layer w0.5: R22.1 70.3,53.955 sw2.7
addr7: R21.1 sw2.8 U4.25 | length 43.5
  Top Layer w0.2: v1(89.15,26.425) 89.6,26.875 U4.25
  Bottom Layer w0.3: sw2.8 72.865,43.56 83.525,32.9 88.332,32.9 90.7,30.532 90.7,27.85 90.775,27.775 89.425,26.425 v1(89.15,26.425)
  Bottom Layer w0.5: R21.1 72.8,53.995 sw2.8
Alarm_out_1: RE1.8 T1.2 | length 12.9
  Top Layer w1: T1.2@20.37,8.25 20.37,11.295 22.675,13.6 RE1.8
Alarm_out_2: RE1.4 T1.1 | length 13.6
  Top Layer w0.3: 24.203,7.312 T1.1@24.315,7.2
  Top Layer w0.5: T1.1@24.315,7.2 T1.1@25.745,7.2
  Bottom Layer w1: T1.1@25.45,8.25 25.45,14.835 RE1.4
BOOT0: R19.2 U4.60 | length 14.9
  Top Layer w0.3: R19.2 75.428,33.997 v1(76.05,33.375) ; v1(76.45,24.4) 76.925,24.875 U4.60
  Bottom Layer w0.3: v1(76.05,33.375) 76.45,32.975 v1(76.45,24.4)
BOOT1: R20.1 U4.28 | length 8
  Top Layer w0.3: U4.28 93.6,28.375 96.7,25.275 R20.1
GND: C1.1 C2.1 C3.1 C4.2 C6.2 C7.2 C8.1 C9.1 C10.2 C11.2 C12.2 C13.2 C14.2 C15.1 C17.1 C19.1 C20.1 D2.2 D3.2 D4.2 D5.2 H1.1 H2.1 H3.1 H4.1 J1.4 J1.6 J1.8 J1.10 J1.12 J1.14 J1.16 J1.18 J1.20 J2.14 J2.16 J2.18 J2.20 J2.22 J2.24 J2.26 J2.27 LORA.1 LORA.8 LORA.9 LORA.10 M1.1 M2.4 M2.5 R8.2 R10.2 R15.1 R19.1 R20.2 R35.2 R42.2 RE1.7 sw1.1 sw1.2 sw1.3 sw1.4 sw2.1 sw2.2 sw2.3 sw2.4 T1.4 U1.2 U2.3 U2.5 U2.6 U4.12 U4.18 U4.63 U5.5 U6.5 U7.5 U8.8 | length 181
  Top Layer w0.3: U2.6@2.421,20.026 U2.6@5.825,16.623 ; D3.2 v1(42.35,42.025) ; U7.5 50.47,21.545 51,22.075 v1(52.675,22.075) 54.9,22.075 55.096,21.879 C20.1 59.571,21.879 60.182,21.268 U6.5 ; R35.2@54.221,13.79 R35.2 55.85,12.162 v1(55.85,10.275) ; v1(58.925,19.6) 58.925,16.725 v1(58.95,16.7) ; R42.2@63.75,13.722 63.925,13.897 v1(63.925,16.775) ; v1(66.85,25.175) C19.1 69.018,19.711 U5.5 ; v1(72.625,40.2) 74.55,40.2 75.725,39.025 D4.2 75.725,37.556 R19.1 ; C17.1 77.1,21.7 78.775,23.375 U4.63 80.975,23.375 81.575,23.975 v1(81.575,28.25) 81.25,28.575 81.25,30.525 v1(78.625,33.15) 78.621,33.154 C15.1 ; v1(82.25,13.575) 84.554,11.271 C14.2 ; v1(83.8,22.8) 86.472,22.8 87.24,22.032 87.24,20.965 U4.12 ; J2.26@87.838,6.162 J2.26@87.838,6.27 ; U4.18 92.8,23.375 95.55,20.625 v1(96.7,20.625)
  Top Layer w0.5: R8.2 v1(1.975,34.95) ; U2.5 3.171,20.351 U2.6 U2.3 ; R15.1 44.471,19.871 v1(45.15,20.55) ; U8.8 48.155,31.775 v1(48.6,31.775) C1.1 ; C2.1 65.477,39.902 v1(65.9,40.325) ; v1@73.3,16.8 73.3,13.633 R10.2@73.304,13.629 ; v1(78.7,54) 81.595,54 LORA.10 ; v1(78.7,56) 78.71,56.01 LORA.9 ; v1(92.55,56.025) 92.565,56.01 LORA.8 ; C3.1 96.125,37.155 v1(96.125,39.825) 97.601,41.301 LORA.1 ; v1(96.7,20.625) R20.2
  Top Layer w1: v1(55.8,32.55) v1(55.8,32.55) U1.2
  Bottom Layer w0.5: v1(58.95,16.7) 63.85,16.7 v1(63.925,16.775) 73.175,16.775 v1(73.325,16.925)
  Bottom Layer w1: 13.7,3.325 26.25,3.325 31.835,8.91 RE1.7
  other v1: 2.875,14.075 5.475,14.075 8.125,14.075 2.875,16.5 5.475,16.5 8.125,16.5 5.525,18.9 2.875,18.925 8.125,18.925
JTCK: J1.9 U4.49 | length 36.5
  Top Layer w0.3: v1(70.3,33.35) 70.3,33.1 71.275,32.125 75.689,32.125 77.439,30.375 U4.49
  Bottom Layer w0.3: J1.9 52.325,42.925 55.925,42.925 61.675,37.175 69.025,37.175 70.3,35.9 v1(70.3,33.35)
JTDI: J1.5 U4.50 | length 40.1
  Top Layer w0.3: v1(69,32.475) 69.85,31.625 75.482,31.625 77.232,29.875 U4.50
  Bottom Layer w0.3: J1.5 47.82,42.35 55.3,42.35 61.425,36.225 65.25,36.225 v1(69,32.475)
JTDO: J1.13 U4.55 | length 34.6
  Top Layer w0.3: v1(74.025,28.575) 74.875,28.575 76.075,27.375 U4.55
  Bottom Layer w0.3: J1.13 62.38,37.95 69.9,37.95 71.275,36.575 71.275,30.425 73.125,28.575 v1(74.025,28.575)
JTMS: J1.7 U4.46 | length 42.2
  Top Layer w0.3: J1.7 49.54,45.7 68.8,45.7 71.2,43.3 74.5,43.3 82.75,35.05 U4.46
JTRST: J1.3 U4.56 | length 43.9
  Top Layer w0.3: v1(71.45,28.625) 72.35,27.725 75,27.725 75.85,26.875 U4.56
  Bottom Layer w0.3: J1.3 46.08,41.55 54.05,41.55 61.05,34.55 63.425,34.55 69.35,28.625 v1(71.45,28.625)
LORA_DIO0: LORA.13 U4.44 | length 20.4
  Top Layer w0.3: v1(78.925,48) 78.934,48.009 LORA.13 ; v1(83.525,34.275) 83.75,34.05 U4.44
  Bottom Layer w0.3: v1(78.925,48) 78.925,42.5 83.525,37.9 v1(83.525,34.275)
LORA_RST: LORA.12 U4.24 | length 33.5
  Top Layer w0.2: v1(89.4,25.325) 89.4,25.575 90.2,26.375 U4.24
  Top Layer w0.3: LORA.12 81.508,49.9 v1(84.25,49.9)
  Bottom Layer w0.2: v1@84.225,49.775 84.225,38.95 91.4,31.775 91.4,27.325 v1(89.4,25.325)
LORA_SPI_MISO: LORA.5 U4.22 | length 37.3
  Top Layer w0.3: U4.22 94.45,25.375 v1(95.025,24.8) ; v1@92.05,50 97.592,50 LORA.5
  Bottom Layer w0.3: v1@92.05,50 92.05,39.975 96.05,35.975 96.05,25.225 95.625,24.8 v1(95.025,24.8)
  other v1: 92.05,50.05
LORA_SPI_MOSI: LORA.6 U4.23 | length 37.3
  Top Layer w0.3: U4.23 v1(95.025,25.875) ; v1(95.025,52) 95.028,51.997 LORA.6
  Bottom Layer w0.3: v1(95.025,25.875) 95.025,36 90.925,40.1 90.925,50.3 92.6,51.975 v1@95.025,51.975
LORA_SPI_NSS: LORA.7 U4.20 | length 47
  Top Layer w0.3: U4.20 93.25,24.375 v1(95.025,22.6) ; v1(92.55,54) 92.554,54.004 LORA.7
  Bottom Layer w0.3: v1(92.55,54) 95.925,54 97.55,52.375 97.55,23.625 96.525,22.6 v1(95.025,22.6)
LORA_SPI_SCK: LORA.4 U4.21 | length 35.9
  Top Layer w0.3: U4.21 93.85,24.875 v1(95.025,23.7) ; v1(93.025,48) 93.034,48.009 LORA.4
  Bottom Layer w0.3: v1(93.025,48) 93.025,39.925 96.475,36.475 96.475,36.257 96.55,36.182 96.55,24.225 96.025,23.7 v1(95.025,23.7)
MC_Alarm_out: R15.2 U4.2 U8.1 | length 42.6
  Top Layer w0.3: R15.2 R15.2@46.93,17.925 ; U8.1 47.5,18.495 R15.2@46.93,17.925 ; v1(49.375,17.925) R15.2@46.93,17.925 ; v1(79.725,17.925) 80.725,17.925 82.25,19.45 U4.2
  Bottom Layer w0.3: v1(49.375,17.925) v1(79.725,17.925)
MC_DQ_DS18B20: J2.6 R2.1 U4.15 | length 43.3
  Top Layer w0.3: J2.6 70.757,9.875 74.679,9.875 R2.1 ; U4.15@88.75,21.152 U4.15 88.75,17.5 v1(91.75,14.5)
  Bottom Layer w0.3: J2.6 75.383,14.5 v1(91.75,14.5)
MC_I2C1_SCL: M2.2 R13.1 U4.58 | length 87.7
  Top Layer w0.3: M2.2@3.125,39.61 M2.2 3.44,39.61 4.55,38.5 R13.1 ; v1(67.075,27.925) 69.657,27.925 69.691,27.959 70.925,26.725 74.575,26.725 75.425,25.875 U4.58
  Bottom Layer w0.3: M2.2@3.125,39.61 M2.2 52.69,39.61 64.375,27.925 v1(67.075,27.925)
MC_I2C1_SDA: M2.3 R14.1 U4.59 | length 89.4
  Top Layer w0.3: M2.3@3.125,42.15 M2.3 6.875,42.15 R14.1@7.95,41.075 ; v1(68.725,26.75) 69.3,26.175 74.418,26.175 75.218,25.375 U4.59
  Bottom Layer w0.3: M2.3@3.125,42.15 M2.3 16.05,42.15 17.425,40.775 52.45,40.775 64.175,29.05 67.175,29.05 68.725,27.5 v1(68.725,26.75)
MC_I2C2_SCL: J2.1 U4.29 | length 39.9
  Top Layer w0.3: J2.1 84.787,10.1 96.675,10.1 98.35,11.775 98.35,25.325 94.8,28.875 U4.29
MC_I2C2_SDA: J2.2 U4.30 | length 45.6
  Top Layer w0.3: J2.2 81.006,6.3 84.6,6.3 87.8,9.5 97,9.5 99,11.5 99,25.6 95.225,29.375 U4.30
MC_sim800_rst: M1.4 U4.41 | length 93.9
  Top Layer w0.3: M1.4 18.213,55.188 24.125,61.1 33.85,61.1 38.325,56.625 39.5,56.625 46.275,49.85 64.95,49.85 67.1,47.7 70.3,47.7 72.2,45.8 75.725,45.8 78.525,43 84.2,43 85.25,41.95 U4.41
MC_SPI2_MOSI: J2.3 U4.36 | length 54.1
  Top Layer w0.3: U4.36 87.75,36.775 v1(88.25,37.275)
  Bottom Layer w0.3: J2.3 79.84,10.675 92.55,10.675 93.925,12.05 93.925,35.675 92.225,37.375 88.35,37.375 v1(88.25,37.275)
MC_SPI2_NSS: J2.5 U4.33 | length 51.2
  Top Layer w0.3: U4.33 89.25,33.4 89.975,34.125 90.4,34.125 v1(91.875,35.6)
  Bottom Layer w0.3: J2.5 76.018,12.375 92.125,12.375 92.675,12.925 92.675,34.8 v1(91.875,35.6)
MC_SPI2_SCK: J2.4 U4.34 | length 52.1
  Top Layer w0.3: U4.34 88.75,34.2 v1(90.15,35.6)
  Bottom Layer w0.3: J2.4 77.904,11.5 92.4,11.5 93.3,12.4 93.3,35.375 92.075,36.6 91.15,36.6 v1(90.15,35.6)
MC_UART1_RX: R3.2 U4.43 | length 55.3
  Top Layer w0.3: R3.2 42.043,48.575 64.275,48.575 66.425,46.425 69.125,46.425 71.375,44.175 74.825,44.175 84.25,34.75 U4.43
MC_UART1_TX: R9.2 U4.42 | length 57.2
  Top Layer w0.3: R9.2 44.008,49.15 64.65,49.15 66.725,47.075 69.65,47.075 71.675,45.05 74.95,45.05 84.75,35.25 U4.42
MC_UART2_RX: U4.17 U5.1 | length 25.4
  Top Layer w0.3: v1@73.705,22.175 U5.1 ; U4.17 91.17,20.805 v1(91.175,20.8)
  Bottom Layer w0.3: v1(73.725,22.175) 77.52,22.175 82.295,17.4 87.775,17.4 v1(91.175,20.8)
MC_UART2_TX: U4.16 U5.4 | length 30.6
  Top Layer w0.3: v1(68.8,21.95) 69.175,21.95 69.895,22.67 U5.4 ; U4.16 89.25,18.775 89.85,18.175 v1(89.85,17.6)
  Bottom Layer w0.3: v1@68.75,21.75 69.775,20.725 78.2,20.725 82.275,16.65 88.9,16.65 v1(89.85,17.6)
MC_UART3_RX: U4.52 U7.1 | length 29.4
  Top Layer w0.3: U7.1 54.28,26.08 55.4,27.2 62.286,27.2 65.661,30.575 75.118,30.575 76.818,28.875 U4.52
MC_UART3_TX: U4.51 U7.4 | length 34.1
  Top Layer w0.3: U7.4 50.47,27.195 52.125,28.85 63.229,28.85 65.454,31.075 75.325,31.075 77.025,29.375 U4.51
MC_UART5_RX: U4.54 U6.1 | length 20.1
  Top Layer w0.3: U6.1 63.992,27.493 66.075,29.575 74.704,29.575 76.404,27.875 U4.54
MC_UART5_TX: U4.53 U6.4 | length 23.4
  Top Layer w0.3: U6.4 60.075,24.896 60.075,25.95 60.75,26.625 62.418,26.625 65.868,30.075 74.911,30.075 76.611,28.375 79.744,28.375 U4.53
NetC2_2: C2.2 R1.1 U1.3 | length 13.9
  Top Layer w0.5: R1.1@62.472,32.676 C2.2
  Top Layer w1: U1.3@58.271,34.849 59.949,34.849 60.9,35.8 C2.2
  Top Layer w1.5: U1.3@52.071,34.849 U1.3@58.271,34.849
NetC5_1: C5.1 R5.2 R8.1 U2.4 | length 10.4
  Top Layer w0.5: R8.1 C5.1 ; U2.4@4.875,26.625 R5.2@4.875,31.146
NetC5_2: C5.2 C6.1 L2.2 R4.1 R5.1 | length 37
  Top Layer w0.5: R5.1 C5.2 15.805,33.155 C6.1 30.15,36.75 L2.2
  Top Layer w1: L2.2 34.05,36.375 35.602,34.823 R4.1
NetD2_1: D2.1 L2.1 U2.2 | length 29.8
  Top Layer w1: U2.2@8.25,26.6 8.25,28.625 9.075,29.45 22.15,29.45 25.15,26.45 L2.1
  Bottom Layer w1: D2.1 27.654,26.821 v1(29.725,26.821) v1(31.496,26.821)
NetD3_1: D3.1 R6.1 | length 2.8
  Top Layer w0.5: D3.1 44.55,35.004 R6.1
NetD4_1: D4.1 R7.1 | length 5.1
  Top Layer w0.3: R7.1 71.5,35.25 71.875,35.625 71.875,36.45 D4.1
NetRE1_5: RE1.5 U8.16 | length 9.6
  Top Layer w0.5: RE1.5 41.85,15.995 U8.16
NRST: C14.1 J1.15 R11.1 U4.7 | length 54.2
  Top Layer w0.3: U4.7 84.75,16.55 86.139,15.161 C14.1 R11.1
  Bottom Layer w0.3: J1.15 63.645,39.225 74.525,39.225 77.45,36.3 77.45,25.825 v1(84.775,18.5)
RS485_1_N: J2.8 R10.1 R25.2 U5.7 | length 20.8
  Top Layer w0.3: J2.8 64.685,9.325 68.775,9.325 70.15,10.7 R25.2 71.7,11.62 ; U5.7 72.435,18.035 71.7,17.3 71.7,11.62 ; R10.1@73.304,11.62 71.7,11.62
RS485_1_P: J2.9 R25.1 R31.2 U5.6 | length 22
  Top Layer w0.3: J2.9 62.674,10.075 67.725,10.075 68.7,11.05 68.7,13.629 ; R31.2 68.7,13.629 ; U5.6 71.165,17.015 70.15,16 R25.1 68.7,13.629
RS485_2_N: J2.10 R42.1 R44.2 U6.7 | length 16.7
  Top Layer w0.3: J2.10 60.689,10.851 R44.2 62.725,11.62 ; U6.7 62.722,18.072 62.7,18.05 62.7,11.645 62.725,11.62 ; R42.1 62.725,11.62
RS485_2_P: J2.11 R44.1 R45.2 U6.6 | length 18.1
  Top Layer w0.3: J2.11 57.193,10.116 58.341,10.116 59.125,10.9 59.125,13.629 ; R45.2 59.125,13.629 ; U6.6 61.452,16.752 60.689,15.989 R44.1 59.125,13.629
RS485_3_N: J2.12 R35.1 R37.2 U7.7 | length 16.4
  Top Layer w0.2: 53.01,11.586 53.025,11.571 ; R35.1@54.333,11.571 R35.1
  Top Layer w0.3: R37.2@51.229,11.571 53.025,11.571 R35.1@54.333,11.571 ; J2.12 54.382,10.066 R35.1 ; 53.01,11.586 U7.7
RS485_3_P: J2.13 R37.1 R38.2 U7.6 | length 15.7
  Top Layer w0.3: R38.2 49.675,13.629 ; J2.13 49.245,10.071 49.675,10.5 49.675,13.629 ; U7.6 51.74,17.865 51.229,17.354 R37.1 49.675,13.629
RX: M1.3 P1.1 R9.1 | length 62.7
  Top Layer w0.3: M1.3 18.573,52.648 25.95,60.025 33.45,60.025 36.526,56.949 R9.1
  Bottom Layer w0.3: M1.3 16.048,52.648 24.74,61.34 P1.1
TX: M1.2 P1.2 R3.1 | length 67.4
  Top Layer w0.3: M1.2 16.742,50.108 23.6,43.25 34.575,43.25 36.526,45.201 R3.1
  Bottom Layer w0.3: M1.2 19.683,50.108 29.325,59.75 35.275,59.75 36.225,58.8 P1.2
UART2_RE: U4.62 U5.2 U5.3 | length 12.7
  Top Layer w0.3: U5.3 U5.2 72.375,24.579 72.375,22.1 73.25,21.225 75.85,21.225 78.5,23.875 U4.62
UART3_RE: U4.57 U7.2 U7.3 | length 34.1
  Top Layer w0.3: U7.3 U7.2 53.01,27.74 v1(52.975,27.775) v1@52.975,28.05 ; v1(65.15,26.825) 65.15,27.3 66.925,29.075 69.75,29.075 71.6,27.225 74.793,27.225 75.643,26.375 U4.57
  Bottom Layer w0.3: v1@53.01,27.74 53.925,26.825 v1(65.15,26.825)
UART5_RE: U4.61 U6.2 U6.3 | length 22.8
  Top Layer w0.3: U6.3 U6.2 62.7,24.766 v1(62.7,21.825) ; v1(75.275,23.4) 77.143,23.4 78.118,24.375 U4.61
  Bottom Layer w0.3: 63.075,21.825 v1(62.7,21.825) 64.275,23.4 v1(75.275,23.4)
VCAP_1: C3.2 U4.31 | length 9.5
  Top Layer w0.3: U4.31 92.85,29.875 94.121,31.146 C3.2
VCAP_2: C15.2 U4.47 | length 4
  Top Layer w0.3: C15.2 81.275,35.2 82.25,34.225 U4.47
pads on no net: J1.1 J1.2 J1.11 J1.17 J1.19 J2.7 LORA.2 LORA.3 LORA.14 LORA.15 LORA.16 M1.6 M1.7 M1.8 M1.9 M1.10 M1.11 M1.12 RE1.2 RE1.6 U4.3 U4.4 U4.5 U4.6 U4.8 U4.9 U4.10 U4.11 U4.14 U4.45 U8.2 U8.3 U8.4 U8.5 U8.6 U8.7 U8.10 U8.11 U8.12 U8.13 U8.14 U8.15

## Polygon pours and split planes (outlines as drawn)
GND on Bottom Layer "poly_GND2" (solid, pour order 0): 1,1 1,64 99,64 99,1 39,1 39,23 15,23 15,1

## Keep-outs
Keep-Out Layer:
  the board outline again, w0.1

## Silkscreen, mask and mechanical layers (free items; w line width, h text height)
Top Overlay:
  text "1" at 74.775,61.15 h1.52
  text "RX" at 40.575,60.625 h2
  text "TX" at 40.525,57.75 h2
  text "0" at 74.7,52.825 h1.52
  text "1" at 54.825,51 h1
  text "2" at 57.5,51 h1
  text "3" at 59.975,51 h1
  text "4" at 62.45,51 h1
  text "5" at 64.925,51 h1
  text "6" at 67.675,51 h1
  text "7" at 70.1,51 h1
  text "8" at 72.55,51 h1
  text "GND" at 4.7,46.8 h1.5
  text "ADD" at 4.7,44.283 h1.5
  text "SDA" at 4.7,41.801 h1.5
  text "SCL" at 4.7,39.301 h1.5
  text "+3.3V LED" at 77.25,37.55 h2
  text "VCC" at 4.7,36.8 h1.5
  text "+4.5V LED" at 37.5,31.8 h2
  text "+12V" at 13.875,11.475 h1.5
  text "GND" at 8.875,11.45 h1.5
  text "RE_O1" at 17.725,11.4 h1.5
  text "RE_O2" at 23.45,11.4 h1.5
Bottom Solder:
  text "www.afra-watergy.com" at 38.6,43.575 h3

## Dimensions
0,65 to 0,0 on Mechanical 1
0,65 to 100,65 on Mechanical 1

## Text inside footprints (layer, text, board x,y; h text height)
J1: Top Overlay "2" at 38.455,46.225 h1.5; Top Overlay "1" at 38.955,43.685 h1.5; Top Overlay "20" at 64.715,46.225 h1.5; Top Overlay "19" at 64.715,43.685 h1.5
J2: Top Overlay "25" at 51.876,1.745 h1.5 r180; Top Overlay "14" at 82.122,1.745 h1.5 r180; Top Overlay "1" at 82.627,11.245 h1.5 r180; Top Overlay "13" at 50.37,11.245 h1.5 r180
LORA: Top Overlay "GND" at 95.2,42.428 h0.76 r180; Top Overlay "NSS" at 95.2,54.249 h0.76 r180; Top Overlay "MOSI" at 95.2,52.279 h0.76 r180; Top Overlay "MISO" at 95.2,50.309 h0.76 r180; Top Overlay "SCK" at 95.2,48.339 h0.76 r180; Top Overlay "DIO5" at 95.2,46.368 h0.76 r180; Top Overlay "DIO4" at 95.2,44.398 h0.76 r180; Top Overlay "GND" at 95.2,56.22 h0.76 r180; Top Overlay "DIO3" at 86.711,42.375 h0.76 r180; Top Overlay "DIO2" at 86.711,44.357 h0.76 r180; Top Overlay "DIO1" at 86.457,46.339 h0.76 r180; Top Overlay "DIO0" at 86.711,48.321 h0.76 r180; Top Overlay "RESET" at 87.6,50.304 h0.76 r180; Top Overlay "3.3V" at 86.711,52.286 h0.76 r180; Top Overlay "GND" at 86.076,56.25 h0.76 r180; Top Overlay "GND" at 86.076,54.268 h0.76 r180
M1: Top Overlay "VCC" at 13.08,57.24 h1.52; Top Overlay "RST" at 13.307,54.7 h1.52; Top Overlay "RXD" at 13.2,52.16 h1.52; Top Overlay "TXD" at 13.277,49.62 h1.52; Top Overlay "GND" at 13.016,47.08 h1.52; Top Overlay "NET" at 13.304,59.78 h1.52
U5: Top Overlay "*" at 74.146,25.21 h1.27 r270; Mechanical 1 "*" at 72.956,24.105 h1.27 r270
U6: Top Overlay "*" at 64.433,25.36 h1.27 r270; Mechanical 1 "*" at 63.243,24.255 h1.27 r270
U7: Top Overlay "*" at 54.721,25.36 h1.27 r270; Mechanical 1 "*" at 53.531,24.255 h1.27 r270